# Altium PCB rota1.PcbDoc
Units mil, origin at the board's own origin, x right, y up, seen from the top; angles counter-clockwise.
Board outline 6000 x 4000 mil, 2 copper layers (Top Layer, Bottom Layer); 7 components, 0 nets, 45 pads, 29 vias.
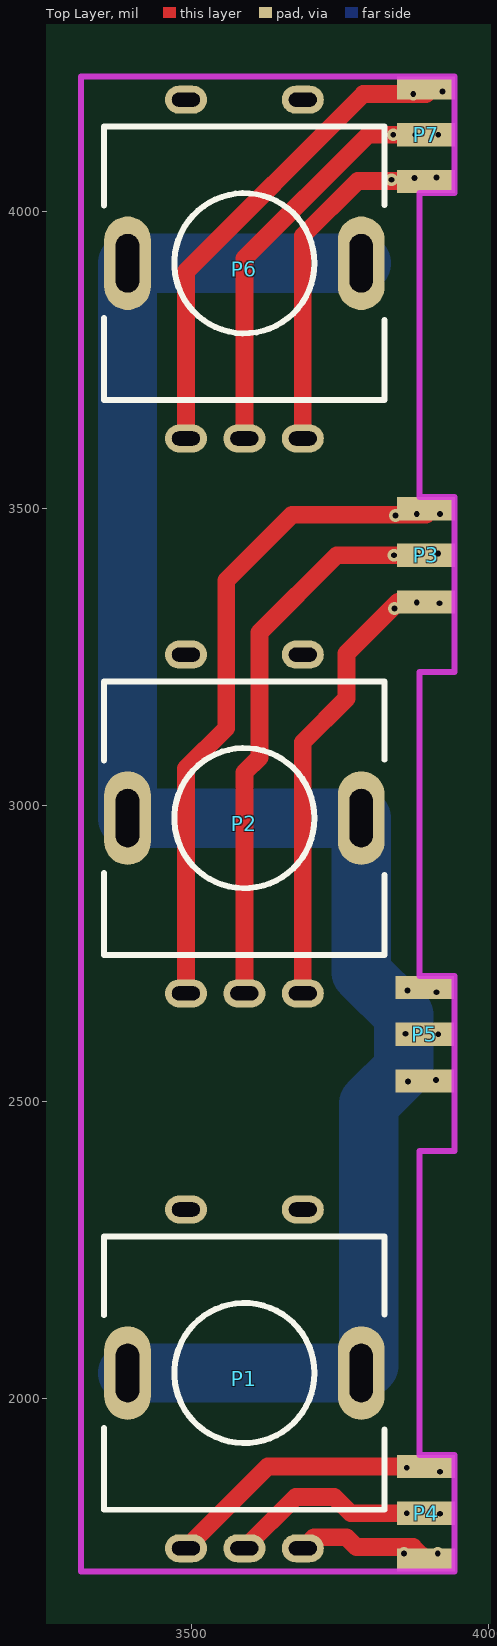
[diagram p0: Top Layer view]
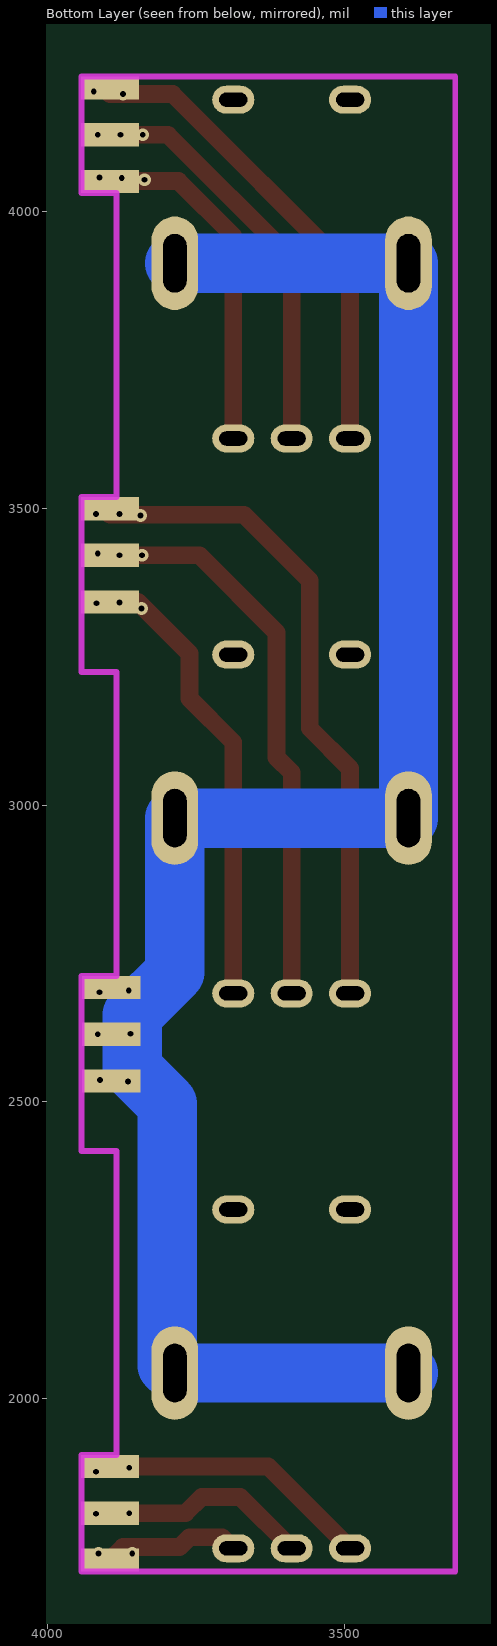
[diagram p1: Bottom Layer view, seen from below]

## Layer stack, top to bottom
Top Layer: signal copper 1.4
Dielectric: dielectric 12.6, FR-4, Dk 4.8
Bottom Layer: signal copper 1.4

## Board outline
1000,1000 7000,1000 7000,5000 1000,5000

## Design rules (kind name [scope] priority, off if disabled: settings)
Clearance [All] p1: gap=10
PolygonConnect [All] p1: connectstyle=Relief reliefconductorwidth=10 reliefentries=4 polygonreliefangle="90 Angle" airgapwidth=10
RoutingVias [All] p1: holewidth=28 width=50 viastyle="Through Hole" minholewidth=28 minwidth=50 maxholewidth=28 maxwidth=50
SolderMaskExpansion [All] p1: expansion=4
Width [All] p1: maxlimit=10 minlimit=10 preferedwidth=10
28 further rules are at their usual default settings.

## Components (designator, comment, footprint, x,y, rotation, side; value= is the part's Value field where it differs from the comment)
P1 "ROTA" rotation_key 3589.09,2042.95 r0 top locked
P2 "ROTA" rotation_key 3589.09,2977.99 r0 top locked
P3 "Header 3" ROTA-3PIN 3894.21,3420.91 r180 top
P4 "Header 3" ROTA-3PIN 3894.21,1806.73 r180 top
P5 "Header 3" ROTA-3PIN 3894.21,2613.82 r0 top
P6 "ROTA" rotation_key 3589.09,3913.03 r0 top locked
P7 "Header 3" ROTA-3PIN 3894.21,4129.57 r180 top

## Footprints (in the part's own frame and the unit in brackets; to place one, negate y for a bottom-side part, rotate by r counter-clockwise, add the part's x,y. Pads: shape width x height; smd on the part's side, far side on the other; paste and mask are expansions set on the pad)
ROTA-3PIN [mm]
  rect 2.5x1 smd: 1(-0.025,2) 2(-0.025,0) 3(-0.025,-2)
  rect 2.5x1 smd far side: 1(-0.025,2) 2(-0.025,0) 3(-0.025,-2)
rotation_key [mm]
  oval 2x4 hole 1 slot 2.5 at 90 deg: 1(-5,0) 2(5,0)
  oval 1.8x1.2 hole 0.6 slot 1.2 at 0 deg: 3(-2.5,-7.5) 4(0,-7.5) 5(2.5,-7.5) 6(2.5,7) 7(-2.5,7)
  silkscreen extent -6,-5.85 6,5.85

## Part data
P1 P2 P6: library part "Header 7", "Header, 7-Pin"
P3 P4 P5 P7: "Header, 3-Pin"

## Via types
v1: diameter 21.65, hole 9.84, Top Layer to Bottom Layer, 29 vias

## Nets (pads, with @x,y where several pads share a name; then routed paths per layer and width w, separated by ;. In a path a pad name is that pad's centre, name@x,y a point inside that pad or via, vN(x,y) a via of type N, cw(c..) or ccw(c..) an arc to the next point about the centre after c; other vN are vias at no path point)
pads on no net: P1.1 P1.2 P1.3 P1.4 P1.5 P1.6 P1.7 P2.1 P2.2 P2.3 P2.4 P2.5 P2.6 P2.7 P3.1 P3.2 P3.3 P4.1 P4.2 P4.3 P5.1 P5.2 P5.3 P6.1 P6.2 P6.3 P6.4 P6.5 P6.6 P6.7 P7.1 P7.2 P7.3
copper on no net: | length 9050.3
  Top Layer w30: 3490.67,1747.68 3628.46,1885.47 3895.2,1885.47 ; 3490.67,2682.72 3490.67,3061.65 3558.58,3129.57 3558.58,3378.58 3669.33,3489.33 3895.2,3489.33 ; 3490.67,3617.76 3490.67,3899.25 3789.41,4197.99 3895.2,4197.99 ; 3589.09,1747.68 3675.71,1834.29 3740.67,1834.29 3768.23,1806.73 3895.2,1806.73 ; 3589.09,2682.72 3589.09,3054.76 3614.68,3080.35 3614.68,3290.98 3744.61,3420.91 3895.2,3420.91 ; 3589.09,3617.76 3589.09,3920.91 3797.76,4129.57 3895.2,4129.57 ; 3687.52,1747.68 3706.22,1766.38 3761.34,1766.38 3778.07,1749.65 3873.54,1749.65 3895.2,1727.99 ; 3687.52,2682.72 3687.52,3105.95 3761.34,3179.76 3761.34,3255.55 3847.95,3342.17 3895.2,3342.17 ; 3687.52,3617.76 3687.52,3959.29 3780.04,4051.81 3862.61,4051.81
  Bottom Layer w100: 3392.24,2042.95 3785.94,2042.95 3798.74,2055.75 3798.74,2496.69 3857.8,2555.75 3857.8,2646.3 3785.94,2718.15 3785.94,2977.99 3392.24,2977.99 3392.24,3913.03 3785.94,3913.03
  other v1: 3857.8,1738.82 3914.88,1738.82 3918.82,1805.75 3862.72,1806.73 3918.82,1876.61 3862.72,1883.5 3864.68,2534.09 3911.93,2537.05 3915.87,2613.82 3860.75,2614.8 3912.91,2684.69 3863.7,2687.64 3842.05,3331.34 3917.83,3340.2 3879.45,3341.18 3841.06,3420.91 3879.45,3420.91 3915.87,3423.86 3844.02,3487.83 3879.45,3490.79 3918.82,3490.79 3837.13,4053.78 3875.51,4056.73 3912.91,4057.72 3840.08,4129.57 3877.48,4129.57 3915.87,4129.57 3873.54,4198.46 3922.76,4202.4

## Keep-outs
Keep-Out Layer:
  lines w10: 3313.5,1708.31 3943.42,1708.31 3943.42,1905.16 3884.37,1905.16 3884.37,2416.97 3943.42,2416.97 3943.42,2712.24 3884.37,2712.24 3884.37,3224.06 3943.42,3224.06 3943.42,3519.33 3884.37,3519.33 3884.37,4031.14 3943.42,4031.14 3943.42,4227.99 3313.5,4227.99 3313.5,1708.31